# Altium PCB PC110.PcbDoc (part 6 of 24)
Units mm, origin at the board's own origin, x right, y up, seen from the top; angles counter-clockwise.
Board outline 150.05 x 107.35 mm, 10 copper layers (In2.Cu, F.Cu, B.Cu, In1.Cu, In3.Cu, In4.Cu, In5.Cu, In6.Cu, In7.Cu, In8.Cu); 936 components, 1434 nets, 4891 pads, 6088 vias.
Unrouted connection lines stored in the file: 2995.
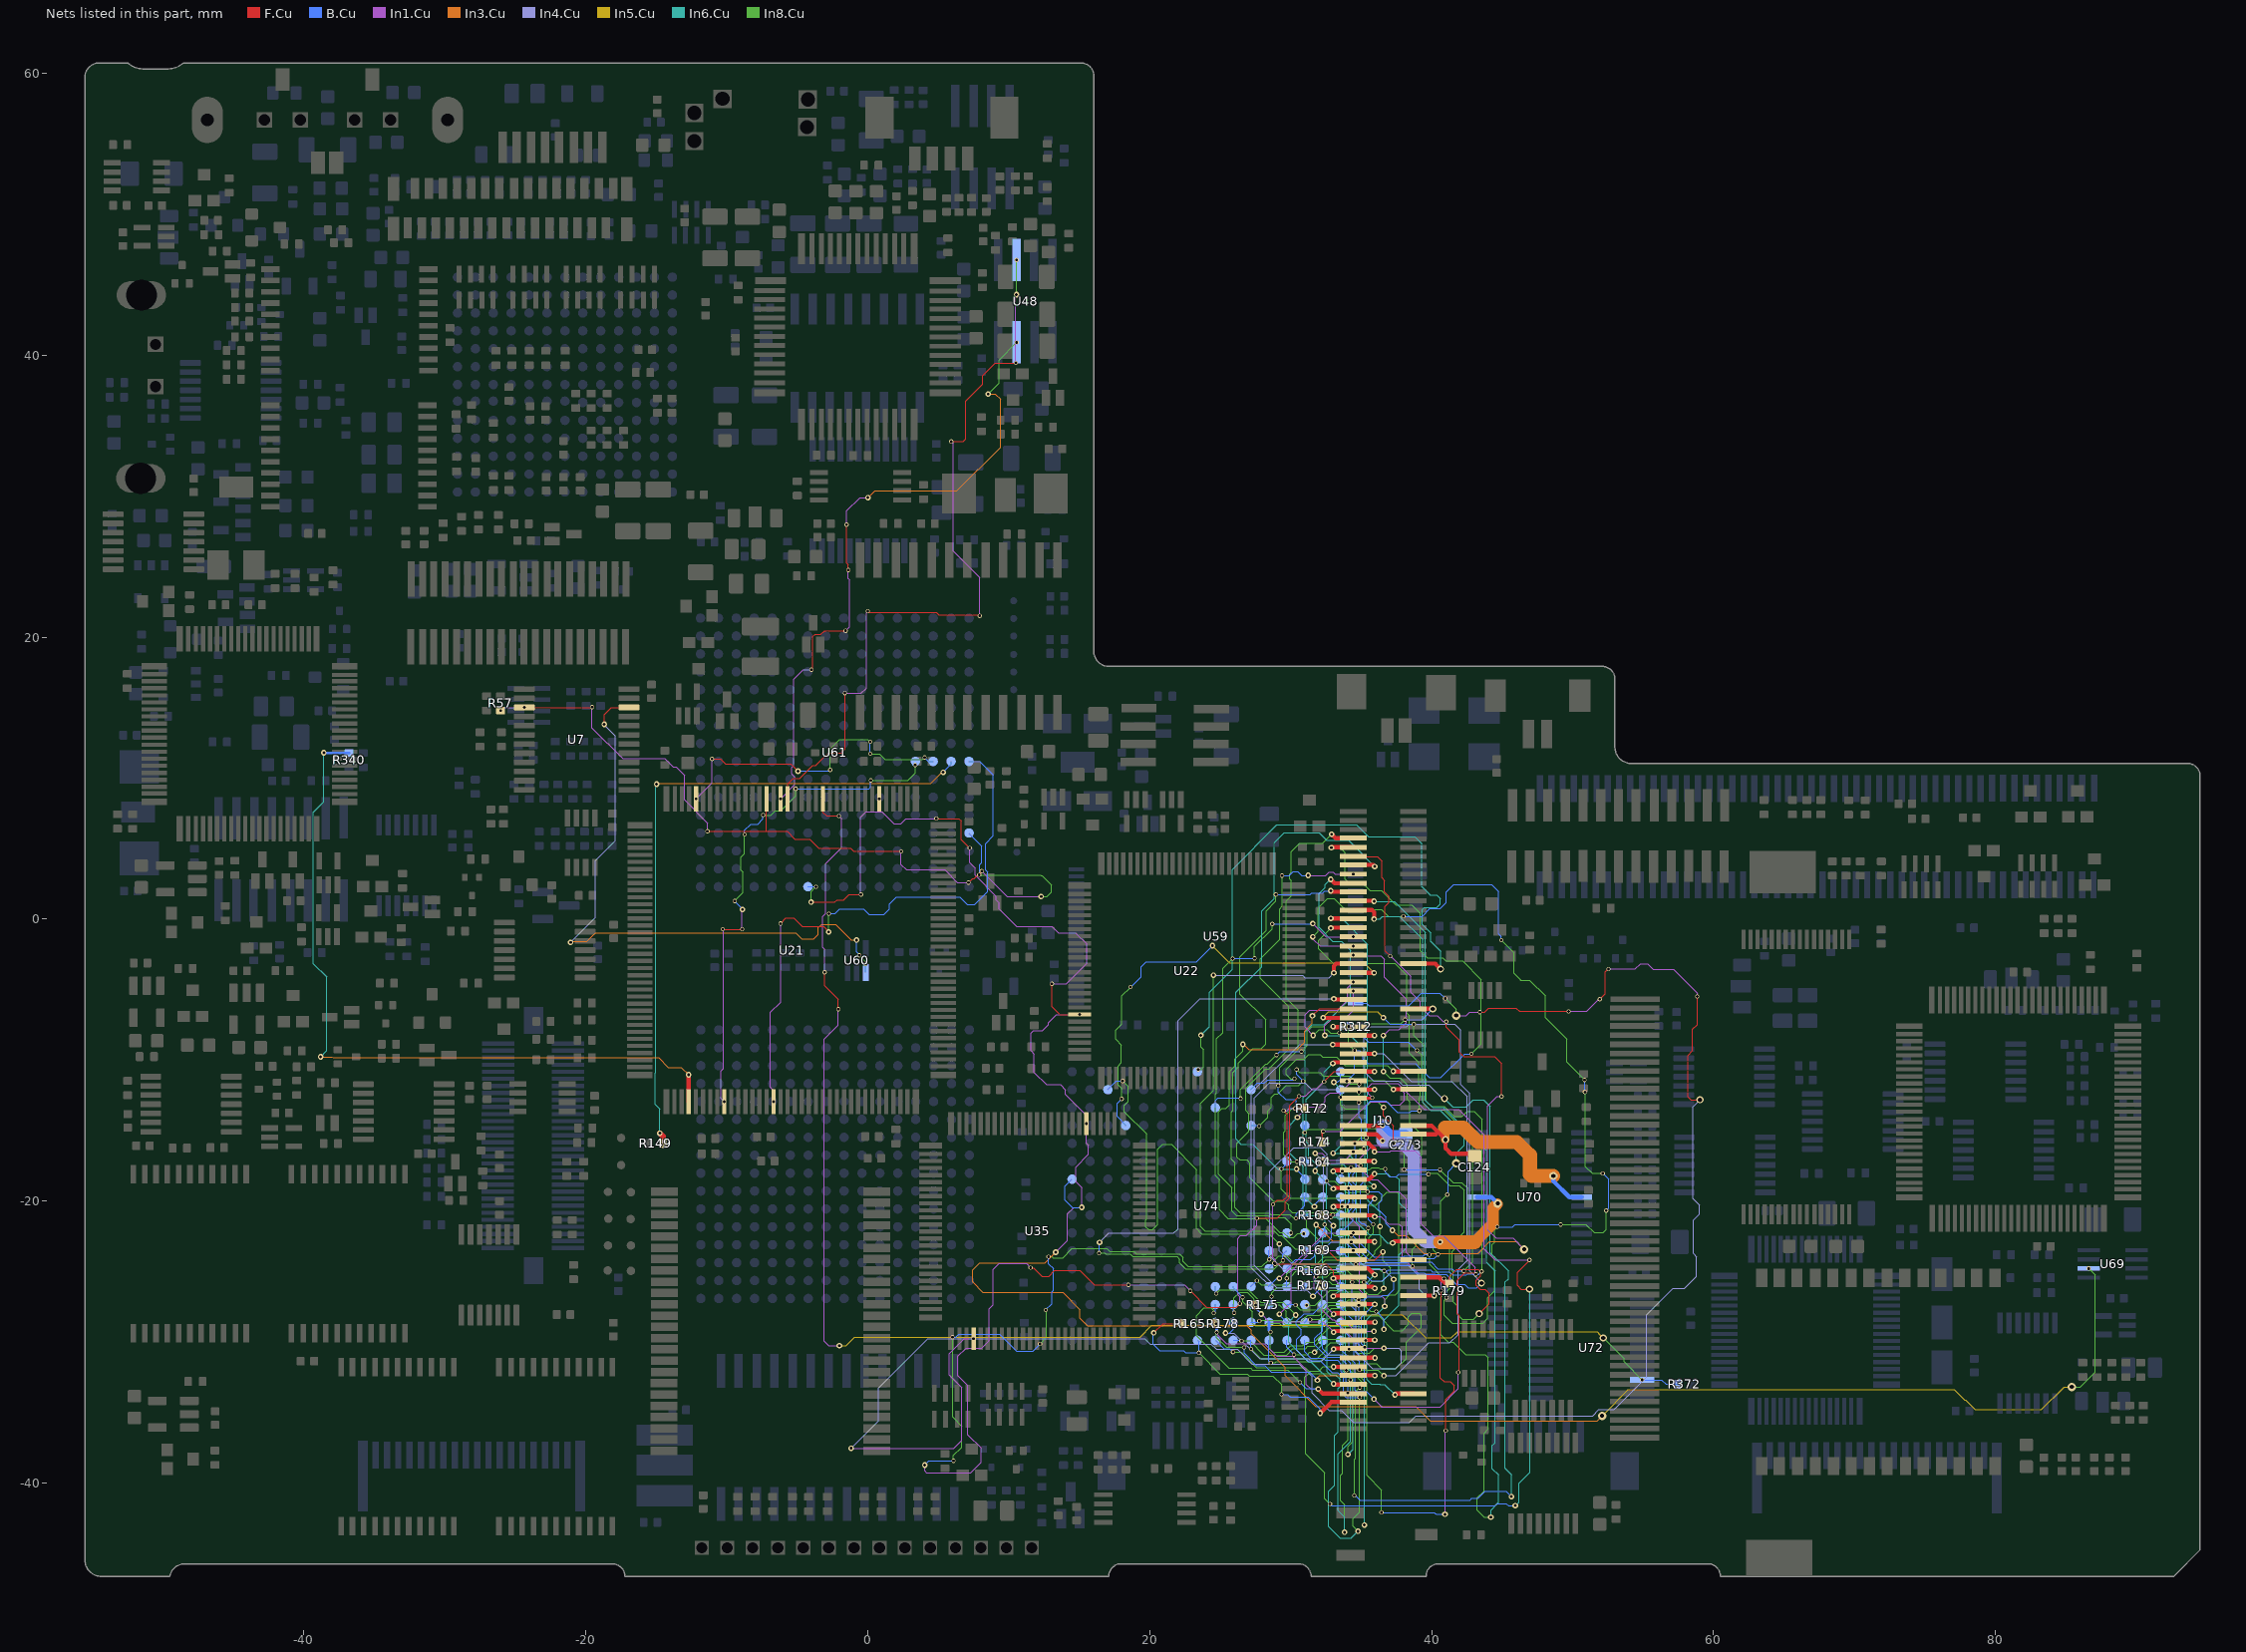
[diagram p13: the nets of this part, all layers, seen from the top]

## Via types
v1: diameter 0.3, hole 0.2, B.Cu to In8.Cu, tented both sides, 1934 vias
v2: diameter 0.4, hole 0.2, F.Cu to B.Cu, tented both sides, 1902 vias
v3: diameter 0.3, hole 0.2, F.Cu to In1.Cu, tented both sides, 1729 vias
v4: diameter 0.6, hole 0.3, F.Cu to B.Cu, tented both sides, 354 vias
v5: diameter 0.5, hole 0.3, F.Cu to B.Cu, tented both sides, 136 vias
v6: diameter 0.4, hole 0.2, B.Cu to In8.Cu, tented both sides, 12 vias
v7: diameter 0.3, hole 0.2, F.Cu to B.Cu, tented both sides, 6 vias
v8: diameter 0.6, hole 0.2, F.Cu to B.Cu, tented both sides, 4 vias
v9: diameter 0.5, hole 0.2, B.Cu to In8.Cu, tented both sides, 3 vias
v10: diameter 0.5, hole 0.2, F.Cu to B.Cu, tented both sides, 2 vias
v11: diameter 0.4, hole 0.3, F.Cu to B.Cu, tented both sides, 2 vias
v12: diameter 0.3, hole 0.2, F.Cu to In4.Cu, tented both sides, 2 vias
v13: diameter 0.6, hole 0.3, B.Cu to In8.Cu, tented both sides, 1 vias
v14: diameter 0.3, hole 0.2, F.Cu to In3.Cu, tented both sides, 1 vias

## Nets (pads, with @x,y where several pads share a name; then routed paths per layer and width w, separated by ;. In a path a pad name is that pad's centre, name@x,y a point inside that pad or via, vN(x,y) a via of type N, cw(c..) or ccw(c..) an arc to the next point about the centre after c; other vN are vias at no path point) (continued)
ACIOWR#: J10.23 U74.P9 | length 21.4
  F.Cu w0.3: J10.23@38.7,-6.35 40.07,-6.35 v5(40.08,-6.36)
  In8.Cu w0.08: v1(26.45,-12.72) 26.45,-12.07 28.24,-10.28 28.35,-10.28 v1(28.99,-9.64) ; v1(30.77,-9.39) 31.18,-8.98 31.18,-7.93 31.49,-7.62 32.33,-7.62 33.01,-6.94 34.97,-6.94 35.45,-7.42 37.81,-7.42 v1(38.11,-7.12)
  B.Cu w0.08: U74.P9@24.65,-13.37 24.65,-12.87 24.83,-12.69 26.42,-12.69 v1(26.45,-12.72) ; v1(28.99,-9.64) 29.24,-9.39 v1(30.77,-9.39) ; v1(38.11,-7.12) 39.32,-7.12 v5(40.08,-6.36)
AEN: U21.114 U22.44 U35.6 U61.G16 U69.6 U74.K1 | length 171.4
  F.Cu w0.08: v2(-4.02,1.21) -2.33,1.21 -2.18,1.36 -1.7,1.36 -1.31,1.75 v3(-0.48,1.75) ; v3(4.86,7.14) 6.47,7.14 6.64,6.97 6.64,5.65 v3(7.24,5.05) ; v3(13.06,-4.58) 13.06,-6.2 13.62,-6.76 v3(15.03,-6.76)
  In1.Cu w0.08: v3(-0.48,1.75) -0.52,1.79 -0.52,7.22 -0.13,7.61 0.83,7.61 ; v3(0.82,8.535) 0.83,8.525 0.83,7.61 ; v3(4.86,7.14) 2.72,7.14 2.34,6.76 1.85,6.76 1,7.61 0.83,7.61 ; v3(7.24,5.05) 7.24,4.02 7.62,3.64 7.62,3.12 9.12,1.62 9.12,1.36 9.32,1.16 9.32,0.73 10.56,-0.51 13.06,-0.51 13.51,-0.96 14.74,-0.96 15.54,-1.76 15.54,-3.14 14.1,-4.58 v3(13.06,-4.58) ; v2(13.33,-23.62) 14.17,-22.78 14.17,-20.88 14.61,-20.44 v2(15.18,-20.44) 15.18,-19.05 14.75,-18.62 14.75,-17.59 15.66,-16.68 15.66,-16.05 15.51,-15.9 v3(15.51,-14.5) 15.51,-13.92 14.03,-12.44 14.03,-12.1 13.66,-11.73 12.67,-11.73 11.81,-10.87 11.81,-9.56 11.58,-9.33 11.58,-8.07 11.76,-7.89 12.39,-7.89 12.81,-7.47 12.81,-7.32 13.37,-6.76 v3(15.03,-6.76)
  In3.Cu w0.08: v2(13.33,-23.62) 12.57,-24.38 7.94,-24.38 7.43,-24.89 7.43,-25.74 8.17,-26.48 13.83,-26.48 15.04,-27.69 15.04,-28.31 15.58,-28.85 26.9,-28.85 27.21,-29.16 27.21,-29.41 29.6,-31.8 29.6,-32.37 31.78,-34.55 38.89,-34.55 39.91,-35.57 51.74,-35.57 v4(52.09,-35.22)
  In5.Cu w0.08: v4(52.09,-35.22) 53.95,-33.36 77.07,-33.36 77.81,-34.1 77.87,-34.1 78.54,-34.77 83.26,-34.77 84.86,-33.17 v4(85.41,-33.17)
  In8.Cu w0.08: v2(-4.02,1.21) -4.02,1.96 v1(-3.68,2.3) ; v4(85.41,-33.17) 86.01,-33.17 87.07,-32.11 87.07,-25.23 86.615,-24.775 v1(86.61,-24.775)
  B.Cu w0.08: U61.G16@-4.25,2.3 v1(-3.68,2.3) ; U74.K1@14.495,-18.44 13.99,-18.945 13.99,-19.92 14.51,-20.44 v2(15.18,-20.44)
AINPACK#: J10.53 R179.2 U74.N14 | length 36
  F.Cu w0.08: R179.2@41.25,-25.85 41.25,-25.36 41.77,-24.84 43.31,-24.84 43.48,-25.01 43.48,-25.31 43.16,-25.63 43.16,-25.98 43.43,-26.25 43.79,-26.25 44.07,-26.53 44.07,-27.28 v5(43.37,-27.98)
  F.Cu w0.3: J10.53@38.7,-25.4 40.54,-25.4 40.99,-25.85 R179.2@41.25,-25.85
  In8.Cu w0.08: v1(31,-15.13) 31.22,-14.91 33.51,-14.91 33.6,-14.82 35.99,-14.82 36.25,-15.08 36.94,-15.08 38.05,-16.19 v1(38.05,-17.75) ; v1(40.59,-17.76) 41.52,-18.69 42.14,-18.69 42.54,-19.09 42.54,-22.5 41.46,-23.58 41.46,-24.96 41.54,-25.04 41.54,-27.15 41.8,-27.41 41.8,-28.01 42.15,-28.36 42.99,-28.36 v5(43.37,-27.98)
  B.Cu w0.08: v1(31,-15.13) U74.N14@31,-14.61 ; v1(38.05,-17.75) 40.58,-17.75 v1(40.59,-17.76)
AOE#: J10.18 U74.T8 | length 44.3
  F.Cu w0.3: J10.18@38.7,-3.15 40.25,-3.15 v5(40.64,-3.54)
  In6.Cu w0.08: v2(23.63,-8.23) 24.25,-7.61 24.25,-5.17 25.86,-3.56 25.86,3.53 29.03,6.7 34.675,6.7 35.515,5.86 38.79,5.86 39.29,5.36 39.29,2.32 39.9,1.71 40.365,1.71 40.6,1.475 40.6,1.08 40.36,0.84 39.49,0.84 39.33,0.68 39.33,-0.36 39.94,-0.97 39.94,-1.58 40.64,-2.28 v5(40.64,-3.54)
  In8.Cu w0.08: v1(23.45,-10.66) 23.64,-10.66 23.83,-10.47 23.83,-9.26 23.63,-9.06 v2(23.63,-8.23)
  B.Cu w0.08: U74.T8@23.38,-10.8 23.45,-10.73 v1(23.45,-10.66)
ARDY: J10.32 R174.2 U74.N11 | length 24.6
  F.Cu w0.1: R174.2@32.23,-15.79 32.23,-15.13 v3(32.31,-15.05)
  F.Cu w0.3: v2(37.29,-12.08) 37.32,-12.05 J10.32@38.7,-12.05
  In1.Cu w0.08: v3(32.31,-15.05) 33.505,-15.05 35.585,-12.97 36.88,-12.97 37.08,-13.17 37.74,-13.17 38.05,-12.86 38.05,-12.32 37.81,-12.08 v2(37.29,-12.08)
  In8.Cu w0.08: v1(27.76,-14.67) 28.38,-14.05 28.38,-13.59 28.61,-13.36 28.61,-12.63 28.86,-12.38 29.1,-12.38 29.67,-11.81 30.57,-11.81 v1(30.89,-11.49) ; v1(30.42,-10.66) 30.65,-10.89 32.08,-10.89 32.3,-11.11 34.18,-11.11 34.45,-11.38 35.29,-11.38 35.34,-11.43 36.64,-11.43 v2(37.29,-12.08)
  B.Cu w0.08: U74.N11@27.19,-14.61 27.7,-14.61 v1(27.76,-14.67) ; v1(30.42,-10.66) 30.42,-11.02 v1(30.89,-11.49)
AREG#: J10.55 U74.R3 | length 48
  F.Cu w0.3: J10.55@38.7,-26.7 v2(40.19,-26.7)
  In4.Cu w0.08: v2(29.2,-23.03) 29.2,-23.54 30.12,-24.46 38.25,-24.46 39.12,-25.33 39.12,-26.27 39.55,-26.7 v2(40.19,-26.7)
  In8.Cu w0.08: v1(18.08,-11.47) 18.48,-11.87 18.48,-12.92 18.21,-13.19 18.21,-13.65 19.79,-15.23 19.79,-21.26 19.72,-21.33 19.72,-21.82 19.91,-22.01 20.2,-22.01 20.56,-21.65 20.56,-16.33 20.91,-15.98 21.54,-15.98 23.31,-17.75 23.31,-21.94 23.69,-22.32 28.49,-22.32 v2(29.2,-23.03)
  B.Cu w0.08: U74.R3@17.03,-12.07 17.63,-11.47 v1(18.08,-11.47)
ARESET: J10.49 U74.T16 | length 17.5
  F.Cu w0.3: v2(37.23,-22.96) 37.34,-22.85 J10.49@38.7,-22.85
  In6.Cu w0.08: v2(33.06,-11.56) 33.63,-12.13 33.63,-15.97 v2(33.01,-16.59) 34.04,-16.59 34.67,-17.22 34.67,-21.49 35.56,-22.38 36.28,-22.38 36.86,-22.96 v2(37.23,-22.96)
  B.Cu w0.08: v2(33.06,-11.56) 33.34,-11.56 33.54,-11.36 U74.T16@33.54,-10.83
AVPP: C124.2 J10.36 J10.37 U70.8 | length 21
  F.Cu w0.3: J10.37@38.7,-15.25 40.29,-15.25 40.44,-15.1 ; J10.36@38.7,-14.65 39.99,-14.65 40.44,-15.1 ; C124.2@43.05,-16.815 42.875,-16.64 41.38,-16.64 40.98,-16.24 v5(40.98,-15.64) 40.44,-15.1
  In3.Cu w0.6: 40.95,-14.78 40.95,-15.61 v5(40.98,-15.64)
  In3.Cu w1: 40.95,-14.78 42.24,-14.78 42.96,-15.5 43.27,-15.81 45.51,-15.81 46.05,-15.81 46.72,-16.48 46.97,-16.73 46.97,-18.1 47.08,-18.21 47.7,-18.21 v4(48.63,-18.21)
  B.Cu w0.3: v4(48.63,-18.21) 48.63,-18.57 49.77,-19.71 U70.8@50.645,-19.71
AWAIT: J10.51 R164.2 U74.R16 | length 22.5
  F.Cu w0.08: v2(36.59,-13.35) 36.59,-13.94 37.29,-14.64 v3(37.29,-15.91)
  In1.Cu w0.08: v3(32.23,-17.21) 32.33,-17.31 34.58,-17.31 ; v3(37.29,-15.91) 37.03,-16.17 36.37,-16.17 36.25,-16.05 35.84,-16.05 34.58,-17.31 ; v3(38.7,-24.15) 38.2,-23.65 38.2,-19.85 37.68,-19.33 37,-19.33 36.14,-18.47 35.74,-18.47 34.58,-17.31
  In8.Cu w0.08: v1(33.54,-12.63) 33.54,-13.16 33.84,-13.46 35.18,-13.46 35.72,-12.92 36.16,-12.92 v2(36.59,-13.35)
  B.Cu w0.08: v1(33.54,-12.63) U74.R16@33.54,-12.07
AWE#: J10.30 U74.R11 | length 14.4
  F.Cu w0.3: v2(37.28,-10.79) 37.29,-10.8 J10.30@38.7,-10.8
  In8.Cu w0.08: v1(30.27,-11.32) 30.02,-11.32 29.7,-11 29.7,-10.65 30.44,-9.91 30.96,-9.91 31.28,-9.59 32.09,-9.59 32.28,-9.78 33.26,-9.78 33.85,-10.37 36.86,-10.37 v2(37.28,-10.79)
  B.Cu w0.08: U74.R11@27.19,-12.07 27.63,-11.63 28.14,-11.63 28.36,-11.41 30.18,-11.41 v1(30.27,-11.32)
AWP: J10.66 R168.2 U74.L13 | length 39.9
  F.Cu w0.2: R168.2@32.2,-21 32.96,-21 v3(32.99,-20.97)
  F.Cu w0.3: v2(37.4,-33.73) 37.48,-33.65 J10.66@38.7,-33.65
  In1.Cu w0.08: v3(32.99,-20.97) 34.02,-20.97 34.9,-21.85 34.9,-26.28 35.33,-26.71 36.43,-26.71 36.67,-26.95 v2(36.67,-27.45)
  In6.Cu w0.08: v2(36.67,-27.45) 36.11,-28.01 35.78,-28.01 35.41,-28.38 35.41,-32.66 35.73,-32.98 36.33,-32.98 36.34,-32.99 36.66,-32.99 v2(37.4,-33.73)
  In8.Cu w0.08: v1(29.34,-17.72) 29.34,-19.15 29.97,-19.78 34.32,-19.78 34.81,-20.27 36.05,-20.27 36.43,-19.89 36.43,-19.74 36.82,-19.35 37.53,-19.35 37.69,-19.51 37.69,-25.12 37.76,-25.19 37.76,-26.3 37.42,-26.64 37.01,-26.64 36.67,-26.98 v2(36.67,-27.45)
  B.Cu w0.08: v1(29.34,-17.72) 29.73,-17.33 U74.L13@29.73,-17.15
B5VDET: J10.89 U74.N4 | length 32.2
  F.Cu w0.3: J10.89@34.45,-3.8 v2(35.92,-3.8)
  In5.Cu w0.08: v2(24.45,-1.88) 25.66,-3.09 35.21,-3.09 v2(35.92,-3.8)
  In8.Cu w0.08: v1(18.01,-12.75) 18.01,-11.99 17.76,-11.74 17.76,-10.4 18,-10.16 18,-8.92 17.6,-8.52 17.6,-7.86 18.03,-7.43 18.03,-5.42 v1(18.64,-4.81)
  B.Cu w0.08: v1(18.01,-12.75) 17.69,-13.07 17.69,-14 18.3,-14.61 U74.N4@18.3,-14.64 ; v1(18.64,-4.81) 19.38,-4.07 19.38,-3.37 19.74,-3.01 23.32,-3.01 v2(24.45,-1.88)
BBVD1: J10.129 R175.1 U74.C11 | length 8.9
  F.Cu w0.3: v2(33.04,-29.29) 33.13,-29.2 J10.129@34.45,-29.2
  In1.Cu w0.08: v3(27.5,-27.36) 27.5,-27.59 v2(27.91,-28) 28.45,-28.54 32.31,-28.54 33.04,-29.27 v2(33.04,-29.29)
  B.Cu w0.08: U74.C11@27.19,-27.31 27.22,-27.31 v2(27.91,-28)
BBVD2: J10.127 R170.2 U74.B11 | length 10.2
  F.Cu w0.3: v2(33.04,-28.01) 33.1,-27.95 J10.127@34.45,-27.95
  In1.Cu w0.08: v3(32.14,-25.97) 32.58,-26.41 32.58,-27.55 v2(33.04,-28.01)
  In8.Cu w0.08: v1(27.77,-28.5) 27.83,-28.44 29.32,-28.44 29.61,-28.73 32.1,-28.73 32.48,-28.35 32.7,-28.35 v2(33.04,-28.01)
  B.Cu w0.08: U74.B11@27.19,-28.58 27.69,-28.58 v1(27.77,-28.5)
BCA0: J10.128 U74.D10 | length 13.8
  F.Cu w0.3: J10.128@34.45,-28.6 35.96,-28.6 v2(35.98,-28.58)
  In8.Cu w0.08: v1(26.6,-26.82) 26.6,-27.14 27.29,-27.83 27.29,-28.64 27.5,-28.85 28.15,-28.85 28.34,-28.66 29.2,-28.66 29.46,-28.92 32.27,-28.92 32.61,-28.58 v2(35.98,-28.58)
  B.Cu w0.08: U74.D10@25.92,-26.04 25.92,-26.14 v1(26.6,-26.82)
BCA1: J10.126 U74.A11 | length 14.8
  F.Cu w0.08: v2@35.95,-27.3 v2(35.96,-27.31)
  F.Cu w0.3: J10.126@34.45,-27.3 v2@35.95,-27.3
  In8.Cu w0.08: v1(27.19,-30.47) 27.81,-31.09 ; 27.85,-31.13 27.81,-31.09 ; v1(35.26,-30.35) 34.98,-30.35 34.67,-30.04 32.83,-30.04 32.5,-30.37 32.5,-30.56 31.88,-31.18 27.9,-31.18 27.81,-31.09
  B.Cu w0.08: v1(27.19,-30.47) U74.A11@27.19,-29.85 ; v1(35.26,-30.35) 35.02,-30.11 35.02,-28.25 v2(35.96,-27.31)
BCA2: J10.124 U74.D11 | length 11.9
  F.Cu w0.3: J10.124@34.45,-26.05 35.84,-26.05 v2(35.97,-26.18)
  In8.Cu w0.08: v1(27.6,-25.64) 27.9,-25.94 29.83,-25.94 30.04,-25.73 30.04,-25.33 30.41,-24.96 32.59,-24.96 32.68,-24.87 33.97,-24.87 34.84,-25.74 v1(35.2,-25.74)
  B.Cu w0.08: U74.D11@27.19,-26.07 27.19,-26.04 27.59,-25.64 v1(27.6,-25.64) ; v1(35.2,-25.74) 35.29,-25.74 35.73,-26.18 v2(35.97,-26.18)
BCA3: J10.122 U74.A12 | length 39.6
  F.Cu w0.3: J10.122@34.45,-24.75 35.48,-24.75 v2(35.96,-25.23)
  In6.Cu w0.08: v2(35.23,-42.97) 35.23,-25.96 v2(35.96,-25.23)
  In8.Cu w0.08: v1(28.59,-31.46) 28.89,-31.46 28.98,-31.37 32.08,-31.37 32.52,-30.93 34,-30.93 34.41,-31.34 34.41,-32.2 35.23,-33.02 v2(35.23,-42.97)
  B.Cu w0.08: U74.A12@28.46,-29.85 28.46,-31.33 v1(28.59,-31.46)
BCA4: J10.120 U74.B13 | length 9.2
  In1.Cu w0.08: v2(29.2,-28.01) 30.05,-27.16 30.05,-24.97 31.52,-23.5 v3(34.45,-23.5)
  B.Cu w0.08: v2(29.2,-28.01) 29.2,-28.05 U74.B13@29.73,-28.58
BCA5: J10.118 U74.D12 | length 7.6
  In1.Cu w0.08: v2(29.2,-25.48) 32.43,-22.25 v3(34.45,-22.25)
  B.Cu w0.08: U74.D12@28.46,-26.07 28.46,-26.04 29.02,-25.48 v2(29.2,-25.48)
BCA6: J10.116 U74.B14 | length 60.8
  F.Cu w0.08: v3(40.67,-26.34) 40.67,-28.42 40.62,-28.47 40.62,-32.53 40.9,-32.81 41.33,-32.81 41.59,-33.07 41.59,-33.48 41,-34.07 v3(41,-36.28)
  F.Cu w0.3: J10.116@34.45,-21 35.86,-21 v2(35.96,-21.1)
  In1.Cu w0.08: v2(35.96,-21.1) 36.42,-21.1 36.93,-21.61 37.69,-21.61 37.92,-21.84 37.92,-23.98 39.08,-25.14 40.22,-25.14 40.67,-25.59 v3(40.67,-26.34) ; v2(40.95,-42.21) 40.95,-36.33 v3(41,-36.28)
  In8.Cu w0.08: v1(31.38,-28.39) 32.09,-28.39 32.89,-27.59 33.76,-27.59 34.31,-28.14 36.26,-28.14 37.29,-29.17 37.92,-29.17 38.35,-28.74 38.35,-28.21 38.6,-27.96 39.12,-27.96 39.28,-28.12 39.28,-28.94 38.21,-30.01 38.21,-31.15 37.48,-31.88 36.45,-31.88 36.1,-31.53 34.74,-31.53 34.58,-31.69 34.58,-32.11 35.4,-32.93 35.4,-39.45 36.44,-40.49 v1(36.44,-42.08)
  B.Cu w0.08: U74.B14@31,-28.61 U74.B14@31.22,-28.39 ; U74.B14@31,-28.58 31.19,-28.39 v1(31.38,-28.39) ; v1(36.44,-42.08) 40.17,-42.08 40.27,-42.18 40.3,-42.18 40.33,-42.21 v2(40.95,-42.21)
BCA7: J10.114 U74.D13 | length 13.2
  F.Cu w0.3: J10.114@34.45,-19.7 35.82,-19.7 v2(35.95,-19.83)
  In8.Cu w0.08: v1(29.72,-25.48) 29.72,-25.16 30.17,-24.71 31.93,-24.71 32.47,-24.17 35.11,-24.17 35.54,-23.74 35.54,-22.57 35.86,-22.25 v1(35.86,-21.64)
  B.Cu w0.08: v1(29.72,-25.48) 29.73,-25.49 U74.D13@29.73,-26.07 ; v1(35.86,-21.64) 35.51,-21.29 35.51,-20.27 v2(35.95,-19.83)
BCA8: J10.94 U74.E15 | length 42.4
  F.Cu w0.3: v2(32.3,-6.98) 32.32,-7 J10.94@34.45,-7
  In5.Cu w0.08: v2(32.3,-6.98) 32.3,-6.95 32.69,-6.56 36.15,-6.56 v2(36.57,-6.98)
  In8.Cu w0.08: v1(32.38,-24.66) 34.31,-24.66 34.53,-24.88 35.26,-24.88 35.38,-24.76 36.22,-24.76 36.4,-24.94 v1(36.64,-24.94) ; v1(38.74,-7.45) 38.74,-8.24 39.51,-9.01 39.51,-11.31 39.61,-11.41 39.61,-12.92 39.96,-13.27 40.89,-13.27 41.59,-13.97 42.17,-13.97 42.52,-13.62 43.01,-13.62 43.59,-14.2 43.59,-24.93 v1(43.54,-24.98)
  B.Cu w0.08: U74.E15@32.27,-24.77 v1(32.38,-24.66) ; v2(36.57,-6.98) 37.04,-7.45 v1(38.74,-7.45) ; v1(36.64,-24.94) 36.87,-24.94 36.92,-24.89 39.93,-24.89 40.05,-25.01 41.26,-25.01 41.49,-25.24 42.46,-25.24 42.54,-25.16 42.93,-25.16 42.97,-25.2 43.32,-25.2 v1(43.54,-24.98)
BCA9: J10.92 U74.F13 | length 49.3
  F.Cu w0.3: v2(33.06,-5.65) 33.11,-5.7 J10.92@34.45,-5.7
  In4.Cu w0.08: v2(16.44,-22.92) 17.09,-22.27 21.71,-22.27 22.02,-21.96 22.02,-7.19 23.56,-5.65 v2(33.06,-5.65)
  In8.Cu w0.08: v1(16.41,-23.68) 16.83,-23.68 16.9,-23.75 18.63,-23.75 18.81,-23.93 21.94,-23.93 22.13,-24.12 22.13,-24.39 22.56,-24.82 28.835,-24.82 v1(29.45,-24.205)
  B.Cu w0.08: v1(16.41,-23.68) 16.44,-23.65 v2(16.44,-22.92) ; v1(29.45,-24.205) 29.45,-23.78 29.7,-23.53 U74.F13@29.73,-23.53
BCA10: J10.86 U74.G15 | length 81.2
  In1.Cu w0.08: v2(31.57,-1.25) 31.57,-1.38 32.09,-1.9 v3(34.45,-1.9)
  In8.Cu w0.08: v2(31.57,-1.25) 31.96,-0.86 31.96,0.81 32.62,1.47 33.09,1.47 33.86,0.7 36.43,0.7 36.92,0.21 v1(37.99,0.21) ; v1(32.41,-21.66) 32.41,-21.78 33.07,-22.44 v1(34.3,-22.44) ; v1(39.83,-23.79) 39.87,-23.83 39.87,-24.5 v1(40.87,-25.5) ; v1(41.06,-26.84) 40.88,-27.02 40.88,-28.08 41.45,-28.65 43.64,-28.65 43.98,-28.31 43.98,-26.84 44.45,-26.37 44.45,-23.97 44.3,-23.82 44.3,-23.07 44.45,-22.92 44.45,-22.03 v1(44.66,-21.82) ; v1(44.94,-1.48) 45.85,-2.39 45.85,-3.84 46.32,-4.31 46.32,-4.32 46.95,-4.32 48.07,-5.44 48.07,-6.99 49.59,-8.51 49.59,-10.14 v1(50.85,-11.4) ; v1(49.15,-21.66) 50.95,-21.66 51.52,-22.23 52.18,-22.23 52.39,-22.02 v1(52.39,-20.67) ; v1(50.87,-12.26) 50.89,-12.28 50.89,-17.54 51.38,-18.03 v1(52.14,-18.03)
  B.Cu w0.08: U74.G15@32.27,-22.23 32.41,-22.09 v1(32.41,-21.66) ; v1(34.3,-22.44) 34.4,-22.44 35.92,-23.96 37.98,-23.96 38.05,-23.89 39.41,-23.89 39.51,-23.79 v1(39.83,-23.79) ; v1(37.99,0.21) 39.32,0.21 39.86,0.75 40.61,0.75 41.04,1.18 41.04,1.92 41.58,2.46 44.24,2.46 44.75,1.95 44.75,-1.04 44.94,-1.23 v1(44.94,-1.48) ; v1(40.87,-25.5) 40.92,-25.5 41.06,-25.64 v1(41.06,-26.84) ; v1(44.66,-21.82) 45.75,-21.82 45.91,-21.66 v1(49.15,-21.66) ; v1(50.85,-11.4) 50.87,-11.42 v1(50.87,-12.26) ; v1(52.14,-18.03) 52.56,-18.45 52.56,-20.5 v1(52.39,-20.67)
BCA11: J10.90 U74.F15 | length 44
  In1.Cu w0.08: v2(31.59,-8.24) 31.02,-7.67 31.02,-6.77 31.35,-6.44 33.33,-6.44 34.04,-5.73 34.04,-4.86 v3(34.45,-4.45)
  In8.Cu w0.08: v2(31.59,-8.24) 32.01,-7.82 32.59,-7.82 32.84,-8.07 v1(33.45,-8.07) ; v1(38.96,-9.3) 39.3,-9.64 39.3,-11.53 39.4,-11.63 39.4,-13.06 39.86,-13.52 40.85,-13.52 42.9,-15.57 42.9,-24.32 v1(42.28,-24.94)
  B.Cu w0.08: U74.F15@32.27,-23.5 32.86,-22.91 33.87,-22.91 35.31,-24.35 38.2,-24.35 38.24,-24.31 39.96,-24.31 40.44,-24.79 41.45,-24.79 41.6,-24.94 v1(42.28,-24.94) ; v1(33.45,-8.07) 34.89,-8.07 35.52,-8.7 38.36,-8.7 v1(38.96,-9.3)
BCA12: J10.112 U74.C14 | length 23.2
  F.Cu w0.3: J10.112@34.45,-18.45 35.55,-18.45 v2(35.94,-18.06)
  In6.Cu w0.08: v2(35.94,-18.06) 36.88,-18.06 37.07,-18.25 37.48,-18.25 37.72,-18.49 37.72,-20.12 38.23,-20.63 38.23,-23.28 37.69,-23.82 37.69,-27.39 36.62,-28.46 v2(36.62,-29.09)
  In8.Cu w0.08: v1(31.13,-27.39) 31.73,-27.39 32.8,-26.32 33.34,-26.32 33.46,-26.44 34.86,-26.44 35.32,-26.9 35.32,-27.49 35.65,-27.82 v1(36.07,-27.82)
  B.Cu w0.08: U74.C14@31,-27.34 31.05,-27.39 v1(31.13,-27.39) 31.08,-27.39 U74.C14@31,-27.31 ; v1(36.07,-27.82) 36.62,-28.37 v2(36.62,-29.09)
BCA13: J10.96 U74.E14 | length 75.1
  F.Cu w0.3: J10.96@34.45,-8.25 v2(35.94,-8.25)
  In4.Cu w0.08: v2(35.94,-8.25) 35.3,-8.25 35.2,-8.35 35.2,-10.79 35.88,-11.47 37.63,-11.47 37.93,-11.77 39.8,-11.77 40.75,-12.72 v5(40.91,-12.72)
  In6.Cu w0.08: v5(40.91,-12.72) 41.49,-13.3 42.45,-13.3 42.93,-12.82 43.7,-12.82 44.16,-13.28 44.16,-23.68 45.44,-24.96 45.44,-25.5 45.2,-25.74 45.2,-38.96 45.66,-39.42 v2(45.66,-40.95)
  In8.Cu w0.08: v1(31.81,-25.36) 32.55,-25.36 32.87,-25.04 33.66,-25.04 v1(34.36,-25.74) ; v1(34.52,-40.88) 34.52,-38.32 34.61,-38.23 34.61,-33.51 v1(34.9,-33.22)
  B.Cu w0.08: U74.E14@31,-24.77 31.21,-24.77 31.8,-25.36 v1(31.81,-25.36) ; v1(34.36,-25.74) 34.36,-27.5 34.65,-27.79 34.65,-30.69 35.22,-31.26 35.22,-32.9 v1(34.9,-33.22) ; v1(34.52,-40.88) 34.59,-40.88 34.92,-41.21 42.72,-41.21 42.85,-41.08 43.29,-41.08 43.79,-40.58 45.29,-40.58 v2(45.66,-40.95)
BCA14: J10.98 U74.C16 | length 40
  F.Cu w0.3: J10.98@34.45,-9.55 35.92,-9.55 v2(35.94,-9.53)
  In4.Cu w0.08: v2(35.94,-9.53) 36.59,-9.53 38.56,-11.5 41.43,-11.5 42.51,-12.58 42.51,-24.19 41.87,-24.83 41.87,-29.47 41.29,-30.05 39.78,-30.05 37.45,-32.38 v2(36.61,-32.38)
  In8.Cu w0.08: v1(34.88,-31.97) 36.2,-31.97 v2(36.61,-32.38)
  B.Cu w0.08: U74.C16@33.54,-27.34 33.54,-27.57 34.48,-28.51 34.48,-30.97 34.88,-31.37 v1(34.88,-31.97)
BCA15: J10.110 U74.E12 | length 17.4
  F.Cu w0.3: J10.110@34.45,-17.15 35.9,-17.15 v2(35.93,-17.18)
  In8.Cu w0.08: v1(28.84,-24.39) 28.84,-24.2 29.15,-23.89 29.72,-23.89 30.35,-24.52 31.79,-24.52 32.37,-23.94 34.98,-23.94 35.32,-23.6 35.32,-22.47 35.51,-22.28 v1(35.51,-21.9) ; v1(34.96,-17.47) 35.25,-17.18 v2(35.93,-17.18)
  B.Cu w0.08: U74.E12@28.46,-24.77 v1(28.84,-24.39) ; v1(34.96,-17.47) 34.97,-17.48 34.97,-17.88 35.12,-18.03 35.12,-18.67 34.94,-18.85 34.94,-20.98 34.83,-21.09 34.83,-21.42 35.01,-21.6 35.21,-21.6 v1(35.51,-21.9)
BCA16: J10.108 U74.A16 | length 37.4
  F.Cu w0.08: v3(41.88,-32.14) 41.94,-32.08 41.94,-28.13 41.81,-28 41.81,-25.61 42.33,-25.09 43.03,-25.09 v3(43.13,-25.19)
  F.Cu w0.3: J10.108@34.45,-15.9 35.53,-15.9 35.94,-16.31 v2(35.94,-16.49)
  In1.Cu w0.08: v2(35.91,-34.04) 36.44,-34.57 36.44,-34.58 40.6,-34.58 41.88,-33.3 v3(41.88,-32.14) ; v2(35.94,-16.49) 37.04,-16.49 37.12,-16.41 38.79,-16.41 39.28,-16.9 39.28,-21.63 40.11,-22.46 40.86,-22.46 43.09,-24.69 43.09,-25.15 v3(43.13,-25.19)
  B.Cu w0.08: U74.A16@33.54,-29.85 33.54,-30.48 34.56,-31.5 34.56,-33.39 34.67,-33.5 35.37,-33.5 v2(35.91,-34.04)
BCA17: J10.95 U74.D16 | length 40.9
  F.Cu w0.3: v2(33.01,-7.61) 33.05,-7.65 J10.95@34.45,-7.65
  In4.Cu w0.08: v2(33.01,-7.61) 38.25,-7.61 38.41,-7.45 41.65,-7.45 42.06,-7.86 42.06,-11.73 42.69,-12.36 42.69,-24.96 v5(43.54,-25.81)
  B.Cu w0.08: U74.D16@33.54,-26.07 33.54,-25.53 33.69,-25.38 35.45,-25.38 35.73,-25.66 36.52,-25.66 37.11,-25.07 39.47,-25.07 39.58,-25.18 41.02,-25.18 41.74,-25.9 42.33,-25.9 42.59,-26.16 43.19,-26.16 v5(43.54,-25.81)
BCA18: J10.97 U74.D15 | length 27.3
  F.Cu w0.3: v2(32.98,-8.89) 32.99,-8.9 J10.97@34.45,-8.9
  In4.Cu w0.08: v2(31.58,-26.75) 31.17,-26.34 28.84,-26.34 27.22,-24.72 27.22,-12.3 30.63,-8.89 v2(32.98,-8.89)
  B.Cu w0.08: v2(31.58,-26.75) 31.58,-26.73 U74.D15@32.27,-26.04
BCA19: J10.99 U74.D14 | length 28.9
  F.Cu w0.3: v2(32.99,-10.23) 33.07,-10.15 J10.99@34.45,-10.15
  In6.Cu w0.08: v2(32.99,-10.23) 32.37,-10.85 32.37,-11.52 31.1,-12.79 31.1,-15.79 31.27,-15.96 31.27,-16.86 31.8,-17.39 33.7,-17.39 34.12,-17.81 34.12,-24.21 34.67,-24.76 36.31,-24.76 36.6,-25.05 v2(36.6,-26.18)
  In8.Cu w0.08: v1(31.3,-26.11) 33.65,-26.11 33.76,-26.22 35.08,-26.22 35.47,-26.61 36.18,-26.61 36.6,-26.19 v2(36.6,-26.18)
  B.Cu w0.08: U74.D14@31,-26.07 31.04,-26.11 v1(31.3,-26.11) 31.07,-26.11 U74.D14@31,-26.04
BCA20: J10.101 U74.C15 | length 61
  In1.Cu w0.08: v2(30.48,-14.05) 31.22,-13.31 32.08,-13.31 32.46,-12.93 32.46,-12.6 32.615,-12.445 32.665,-12.445 32.79,-12.32 33.51,-12.32 v3(34.36,-11.47)
  In6.Cu w0.08: v2(30.48,-14.05) 29.89,-14.64 29.89,-16.58 30.88,-17.57 30.88,-20.68 31.23,-21.03 32.31,-21.03 32.46,-21.18 32.46,-22.41 32.26,-22.61 32.26,-25.52 32.6,-25.86 32.6,-32.09 32.83,-32.32 33.2,-32.32 33.51,-32.63 33.51,-33.16 33.38,-33.29 33.38,-36.35 33.1,-36.63 33.1,-40.15 32.68,-40.57 32.68,-43.09 33.49,-43.9 34.29,-43.9 v2(34.78,-43.41)
  In8.Cu w0.08: v2(34.78,-43.41) 34.43,-43.06 34.43,-42.5 34.89,-42.04 v1(34.89,-33.91)
  B.Cu w0.08: U74.C15@32.27,-27.31 31.6,-27.98 30.95,-27.98 30.4,-28.53 30.4,-28.75 30.75,-29.1 30.75,-29.467 30.43,-29.787 30.43,-30.57 31.16,-31.3 32.08,-31.3 32.94,-32.16 33.34,-32.16 33.74,-32.56 33.74,-33.71 33.94,-33.91 v1(34.89,-33.91)
BCA21: J10.103 U74.B15 | length 73.9
  F.Cu w0.08: v5(46.94,-26.24) 46.35,-26.24 46.09,-25.98 46.09,-25.04 46.94,-24.19 v3(46.94,-24.17)
  F.Cu w0.2: J10.103@34.45,-12.7 35.74,-12.7 v3(35.79,-12.65)
  In1.Cu w0.08: v3(35.79,-12.65) 35.52,-12.38 35.52,-11.9 35.78,-11.64 37.62,-11.64 39.47,-13.49 41.92,-13.49 43.73,-15.3 43.73,-23.39 44.51,-24.17 v3(46.94,-24.17)
  In6.Cu w0.08: v2(45.93,-41.59) 46.18,-41.34 46.18,-40.02 46.97,-39.23 46.97,-26.27 v5(46.94,-26.24)
  In8.Cu w0.08: v1(32.79,-41.48) 32.42,-41.11 32.42,-39.26 31.07,-37.91 31.07,-34 31,-33.93 31,-32.49 31.26,-32.23 33.7,-32.23 v1(33.94,-31.99)
  B.Cu w0.08: U74.B15@32.27,-28.58 32.27,-29.17 31.71,-29.73 31.71,-30.17 32.6,-31.06 33.49,-31.06 33.94,-31.51 v1(33.94,-31.99) ; v1(32.79,-41.48) 32.92,-41.61 44.49,-41.61 44.66,-41.44 45.29,-41.44 45.44,-41.59 v2(45.93,-41.59)
BCA22: J10.109 U74.E13 | length 14.2
  In1.Cu w0.08: v2(31.73,-16.6) 32.23,-16.6 32.72,-17.09 33.86,-17.09 v3(34.45,-16.5)
  In4.Cu w0.08: v2(31.73,-16.6) 32.32,-17.19 32.32,-21.03 v2(33.03,-21.74)
  B.Cu w0.08: U74.E13@29.73,-24.77 30.36,-24.14 31.43,-24.14 31.69,-23.88 31.69,-23.17 32.05,-22.81 32.69,-22.81 32.91,-22.59 32.91,-21.86 v2(33.03,-21.74)
BCA23: J10.111 U74.A15 | length 31.9
  F.Cu w0.3: v2(33.02,-17.87) 33.09,-17.8 J10.111@34.45,-17.8
  In6.Cu w0.08: v2(33.02,-17.87) 33.91,-18.76 33.91,-31.73 34.41,-32.23 34.41,-37.61 v2(34.06,-37.96)
  In8.Cu w0.08: v2(34.06,-37.96) 34.06,-37.38 34.37,-37.07 34.37,-33.14 34.25,-33.02 v1(34.25,-32.68)
  B.Cu w0.08: U74.A15@32.27,-29.85 32.27,-30.46 32.68,-30.87 33.62,-30.87 34.25,-31.5 v1(34.25,-32.68)
BCA24: J10.113 U74.C13 | length 33.5
  F.Cu w0.3: v2(33.03,-19.12) 33.1,-19.05 J10.113@34.45,-19.05
  In4.Cu w0.08: v2(33.03,-19.12) 32.59,-18.68 32.59,-16.68 32.1,-16.19 30.96,-16.19 30.945,-16.205 30.215,-16.205 28.53,-17.89 28.53,-23.88 29.48,-24.83 36.59,-24.83 v2(37.31,-25.55)
  In8.Cu w0.08: v1(30.35,-27.37) 30.68,-27.7 32.11,-27.7 32.62,-27.19 33.9,-27.19 34.09,-27 v1(34.82,-27)
  B.Cu w0.08: U74.C13@29.73,-27.31 30.29,-27.31 v1(30.35,-27.37) ; v1(34.82,-27) 35.24,-27 35.46,-26.78 36.42,-26.78 36.54,-26.66 36.91,-26.66 37.31,-26.26 v2(37.31,-25.55)
BCA25: J10.115 U74.A14 | length 41.8
  F.Cu w0.3: v2(33.03,-20.4) 33.08,-20.35 J10.115@34.45,-20.35
  In6.Cu w0.08: v2(33.03,-20.4) 33.71,-21.08 33.71,-32.06 34.24,-32.59 34.24,-37.05 33.36,-37.93 33.36,-41.95 33.83,-42.42 33.83,-43.47 v2(33.82,-43.48)
  In8.Cu w0.08: v2(33.82,-43.48) 33.82,-41.53 33.54,-41.25 33.54,-39.44 33.67,-39.31 33.67,-37.33 34.07,-36.93 34.07,-33.6 v1(34.06,-33.59)
  B.Cu w0.08: U74.A14@31,-29.85 31,-30.69 31.43,-31.12 32.3,-31.12 32.46,-31.28 33.33,-31.28 33.59,-31.54 33.59,-32.1 33.92,-32.43 33.92,-32.8 34.06,-32.94 v1(34.06,-33.59)
BCD0: J10.130 U74.A10 | length 12.5
  F.Cu w0.3: J10.130@34.45,-29.85 v2(35.96,-29.85)
  In8.Cu w0.08: v1(26.51,-29.91) 27.11,-29.91 28.11,-30.91 29.71,-30.91 30.15,-30.47 31.05,-30.47 31.22,-30.3 31.69,-30.3 32.2,-29.79 34.61,-29.79 34.69,-29.87 v1(35.33,-29.87)
  B.Cu w0.08: U74.A10@25.925,-29.87 26.47,-29.87 v1(26.51,-29.91) ; v1(35.33,-29.87) 35.94,-29.87 v2(35.96,-29.85)
BCD1: J10.132 U74.C10 | length 18.3
  F.Cu w0.3: J10.132@34.45,-31.1 35.96,-31.1 v2(35.98,-31.12)
  In8.Cu w0.08: v1(25.99,-27.91) 25.99,-26.87 26.38,-26.48 26.91,-26.48 27.77,-27.34 29.19,-27.34 29.67,-27.82 29.67,-28.25 29.94,-28.52 30.78,-28.52 31.21,-28.09 32.07,-28.09 32.77,-27.39 v1(34.82,-27.39)
  B.Cu w0.08: U74.C10@25.92,-27.31 25.92,-27.84 v1(25.99,-27.91) ; v1(34.82,-27.39) 34.83,-27.4 34.83,-30.49 35.46,-31.12 v2(35.98,-31.12)
BCD1#: J10.75 R312.2 U74.K16 | length 47.3
  F.Cu w0.3: v2(32.89,5.07) 32.92,5.1 J10.75@34.45,5.1
  In8.Cu w0.08: v2(32.89,5.07) 33.51,5.07 33.86,4.72 33.86,2.86 34.245,2.475 35.175,2.475 35.61,2.04 36.45,2.04 37.48,1.01 38.6,1.01 39.2,0.41 39.2,-2.25 39.68,-2.73 40.77,-2.73 41.01,-2.97 42.21,-2.97 43.52,-4.28 43.52,-8.85 v1(42.82,-9.55) ; v1(33.66,-17.87) 33.66,-17.37 34.42,-16.61 34.59,-16.61 34.92,-16.28 v1(35.19,-16.28) ; v1(33.98,-11.49) 34.19,-11.7 v1(34.86,-11.7) ; v1(34.11,-7.61) 34.11,-8.88 v1(34.53,-9.3) ; v1(34.84,-12.99) 34.85,-12.98 v1(34.85,-12.26)
  B.Cu w0.08: U74.K16@33.54,-18.42 33.66,-18.3 v1(33.66,-17.87) ; v1(33.98,-11.49) 34.53,-10.94 v1(34.53,-9.3) 34.87,-9.3 35.13,-9.56 35.13,-9.91 35.47,-10.25 38.85,-10.25 39.83,-11.23 40.65,-11.23 42.33,-9.55 v1(42.82,-9.55) ; v1(34.84,-12.99) 34.84,-14.02 35.04,-14.22 35.04,-15.64 35.19,-15.79 v1(35.19,-16.28) ; v1(34.85,-12.26) 34.86,-12.25 v1(34.86,-11.7)
BCD2: J10.134 U74.B9 | length 15.6
  F.Cu w0.3: J10.134@34.45,-32.35 35.95,-32.35 v2(35.97,-32.37)
  In3.Cu w0.08: v2(31.9,-32.7) 31.9,-32.51 32.04,-32.37 v2(35.97,-32.37)
  In8.Cu w0.08: v1(24.75,-29.3) 24.75,-29.67 25.45,-30.37 v1(26.7,-30.37)
  B.Cu w0.08: v1(26.7,-30.37) 26.7,-30.78 27.58,-31.66 28.15,-31.66 28.62,-32.13 31.33,-32.13 v2(31.9,-32.7)
  B.Cu w0.2: U74.B9@24.65,-28.58 24.65,-28.595 24.75,-28.695 v1(24.75,-29.3)
BCD2#: J10.137 R165.1 U74.A8 | length 21.2
  F.Cu w0.08: v2(20.29,-29.34) 20.94,-28.69 R165.1@22.34,-28.69
  F.Cu w0.3: v2(32.09,-35.04) 32.88,-34.25 J10.137@34.45,-34.25
  In8.Cu w0.08: v1(23.49,-30.75) 24.99,-32.25 26.94,-32.25 27.08,-32.39 28.73,-32.39 29.35,-33.01 v1(29.35,-33.7)
  B.Cu w0.08: v2(20.29,-29.34) 20.24,-29.39 20.24,-30.14 20.71,-30.61 22.41,-30.61 22.54,-30.74 23.48,-30.74 v1(23.49,-30.75) 23.49,-29.975 U74.A8@23.385,-29.87 ; v1(29.35,-33.7) 29.78,-33.7 29.97,-33.89 31.24,-33.89 32.09,-34.74 v2(32.09,-35.04)
BCD3: J10.74 U74.L14 | length 30.8
  F.Cu w0.3: v2(32.9,6.03) 33.18,5.75 J10.74@34.45,5.75
  In8.Cu w0.08: v1(29.12,-11.8) 29.23,-11.69 29.23,-10.52 30.52,-9.23 30.52,-6.44 29.68,-5.6 29.68,1.29 30.03,1.64 30.03,2.74 29.93,2.84 29.93,3.21 30.05,3.33 30.05,4.8 30.64,5.39 32.26,5.39 v2(32.9,6.03) ; v1(30.39,-13.39) 30.14,-13.39 29.63,-13.9 29.63,-15.02 29.52,-15.13 29.52,-16.72 30,-17.2 v1(30.44,-17.2)
  B.Cu w0.08: v1(29.12,-11.8) 29.12,-12.28 29.64,-12.8 30.3,-12.8 30.39,-12.89 v1(30.39,-13.39) ; v1(30.44,-17.2) 30.49,-17.15 U74.L14@31,-17.15
BCD4: J10.76 U74.K15 | length 55.9
  F.Cu w0.08: J10.76@34.45,4.45 36.15,4.45 36.47,4.13 36.47,2.94 36.66,2.75 36.66,1.93 36.98,1.61 36.98,1.19 36.7,0.91 36.7,-2.25 v3(37.06,-2.61) ; v3(41.04,-7.27) 41.04,-7.66 41.96,-8.58 41.96,-9.43 42.27,-9.74 44.48,-9.74 44.96,-10.22 v3(44.96,-12.57)
  In1.Cu w0.08: v3(37.06,-2.61) 37.09,-2.61 38.52,-4.04 38.52,-5.18 39.2,-5.86 39.2,-6.21 39.82,-6.83 40.4,-6.83 40.84,-7.27 v3(41.04,-7.27) ; v3(44.96,-12.57) 44.65,-12.57 43.98,-13.24 43.98,-22.04 44.56,-22.62 45.77,-22.62 v4(46.56,-23.41)
  In3.Cu w0.08: v2(37.22,-22.06) 37.61,-22.45 38.19,-22.45 39.43,-23.69 43.3,-23.69 44.12,-22.87 46.02,-22.87 v4(46.56,-23.41)
  In8.Cu w0.08: v1(32.57,-18.57) 33.13,-18.57 33.95,-19.39 34.57,-19.39 34.63,-19.33 v1(35.45,-19.33)
  B.Cu w0.08: U74.K15@32.27,-18.42 32.42,-18.57 v1(32.57,-18.57) ; v1(35.45,-19.33) 35.46,-19.34 36.26,-19.34 36.26,-19.35 36.46,-19.55 36.46,-19.93 36.26,-20.13 36.26,-20.63 36.75,-21.12 36.75,-21.59 v2(37.22,-22.06)
BCD5: J10.78 U74.J16 | length 39.5
  In1.Cu w0.08: v2(31.24,3.11) 32.49,3.11 32.71,3.33 33.02,3.33 33.15,3.2 v3(34.45,3.2)
  In8.Cu w0.08: v1(29.39,3.09) 29.39,0.92 29.21,0.74 29.21,-1.45 27.86,-2.8 27.86,-4.19 29.87,-6.2 29.87,-9.21 28.45,-10.63 28.19,-10.63 26.82,-12 26.82,-13.57 27.05,-13.8 27.05,-15.05 26.2,-15.9 26.2,-16.88 26.39,-17.07 26.88,-17.07 27.12,-17.31 27.12,-18.32 28.78,-19.98 29.56,-19.98 29.85,-20.27 29.85,-20.55 30.1,-20.8 33.27,-20.8 33.64,-20.43 v1(33.64,-20.39)
  B.Cu w0.08: v1(29.39,3.09) 29.88,3.09 30.17,3.38 30.5,3.38 30.77,3.11 v2(31.24,3.11) ; U74.J16@33.54,-19.69 33.54,-20.29 v1(33.64,-20.39)
BCD6: J10.80 U74.J14 | length 37.5
  F.Cu w0.3: v2(32.84,2.01) 32.9,1.95 J10.80@34.45,1.95
  In8.Cu w0.08: v1(28.95,1.75) 28.95,1.28 28.26,0.59 28.26,-0.79 26.39,-2.66 26.39,-5.31 28.22,-7.14 28.22,-8.87 27.92,-9.17 27.31,-9.17 26.28,-10.2 26.28,-10.49 25.9,-10.87 25.9,-13.56 25.8,-13.66 25.8,-17.02 26.06,-17.28 26.06,-20.47 26.43,-20.84 28.48,-20.84 28.59,-20.95 29.95,-20.95 30.21,-21.21 v1(30.38,-21.21)
  B.Cu w0.08: v1(28.95,1.75) 31.38,1.75 31.49,1.86 32.27,1.86 32.41,2 32.83,2 v2(32.84,2.01) ; v1(30.38,-21.21) 30.38,-20.92 31,-20.3 U74.J14@31,-19.69
BCD7: J10.82 U74.H14 | length 42.9
  F.Cu w0.3: J10.82@34.45,0.65 35.76,0.65 35.92,0.49 v2(35.92,0.01)
  In6.Cu w0.08: v2(35.92,0.01) 36.32,0.01 36.52,0.21 37.72,0.21 39.38,-1.45 39.38,-13 39.94,-13.56 40.61,-13.56 42.29,-15.24 42.29,-16.05 41.75,-16.59 v4(41.75,-17.32)
  In8.Cu w0.08: v1(31.12,-21.22) 31.12,-21.89 32.12,-22.89 v1(34.29,-22.89) ; v1(40.46,-23.78) 40.13,-23.45 40.13,-22.78 40.63,-22.28 40.63,-20.01 v1(41.1,-19.54)
  B.Cu w0.08: U74.H14@31,-20.99 31.12,-21.11 v1(31.12,-21.22) 31.12,-21.08 U74.H14@31,-20.96 ; v1(34.29,-22.89) 35.56,-24.16 38.08,-24.16 38.17,-24.07 40.17,-24.07 v1(40.46,-23.78) ; v1(41.1,-19.54) 41.16,-19.48 41.16,-17.91 v4(41.75,-17.32)
BCD8: J10.131 U74.B10 | length 11.4
  F.Cu w0.3: v2(33.04,-30.5) 33.09,-30.45 J10.131@34.45,-30.45
  In4.Cu w0.08: v2(25.38,-29.35) 25.98,-29.35 27.8,-31.17 31.29,-31.17 31.48,-31.36 32.18,-31.36 v2(33.04,-30.5)
  B.Cu w0.08: v2(25.38,-29.35) 25.65,-29.35 25.92,-29.08 U74.B10@25.92,-28.58
BCD9: J10.133 U74.A9 | length 10.8
  F.Cu w0.3: v2(33.04,-31.75) J10.133@34.45,-31.75
  In8.Cu w0.08: v1(25.91,-30.7) 26.49,-30.7 27.58,-31.79 31.03,-31.79 31.29,-32.05 32.01,-32.05 32.31,-31.75 v2(33.04,-31.75)
  B.Cu w0.08: U74.A9@24.655,-29.87 25.25,-30.465 25.665,-30.465 25.9,-30.7 v1(25.91,-30.7)
BCD10: J10.135 U74.D9 | length 15
  F.Cu w0.3: v2(33.04,-32.95) 33.09,-33 J10.135@34.45,-33
  In6.Cu w0.08: v2(30.36,-28.07) 29.86,-28.57 29.86,-29.99 31.27,-31.4 31.45,-31.4 33,-32.95 v2(33.04,-32.95)
  In8.Cu w0.08: v1(24.72,-26.55) 24.98,-26.29 27.01,-26.29 27.89,-27.17 29.46,-27.17 v2(30.36,-28.07)
  B.Cu w0.08: U74.D9@24.65,-26.04 24.65,-26.48 v1(24.72,-26.55)
BCD11: J10.77 U74.K14 | length 38.2
  F.Cu w0.3: J10.77@34.45,3.85 35.85,3.85 v2(35.96,3.74)
  In6.Cu w0.08: v2(30.42,-17.72) 29.07,-17.72 27.3,-15.95 26.48,-15.95 26.12,-15.59 26.12,-5.19 27.94,-3.37 27.94,0.59 28.83,1.48 28.83,5.42 29.54,6.13 32.02,6.13 32.56,5.59 34.11,5.59 v2(35.96,3.74)
  B.Cu w0.08: v2(30.42,-17.72) 30.42,-17.76 31,-18.34 U74.K14@31,-18.42
BCD12: J10.79 U74.J15 | length 29.7
  F.Cu w0.3: v2(32.84,2.83) 33.12,2.55 J10.79@34.45,2.55
  In6.Cu w0.08: v2(31.68,-20.39) 31.1,-19.81 31.1,-16.15 30.9,-15.95 30.9,-12.65 31.04,-12.51 31.04,-7.97 31.53,-7.48 32.38,-7.48 34.24,-5.62 34.24,-2.2 33.6,-1.56 32.99,-1.56 32.03,-0.6 32.03,1.82 32.46,2.25 32.46,2.45 v2(32.84,2.83)
  B.Cu w0.08: v2(31.68,-20.39) 31.68,-20.28 U74.J15@32.27,-19.69
BCD13: J10.81 U74.H16 | length 91.1
  F.Cu w0.3: J10.81@34.45,1.3 35.89,1.3 v2(35.92,1.27)
  In6.Cu w0.08: v2(35.92,1.27) 37.35,1.27 39.56,-0.94 39.56,-12.85 40.07,-13.36 40.82,-13.36 43.89,-16.43 43.89,-24.33 44.5,-24.94 44.5,-37.13 44.3,-37.33 44.3,-38.97 44.74,-39.41 44.74,-41.36 44.2,-41.9 v2(44.2,-42.41)
  In8.Cu w0.08: v1(34.28,-17.62) 34.67,-17.62 34.83,-17.78 35.6,-17.78 35.77,-17.61 36.23,-17.61 36.33,-17.71 v1(36.71,-17.71) ; v1(39.77,-18.08) 39.85,-18 40.39,-18 41.28,-18.89 41.97,-18.89 42.29,-19.21 42.29,-22.19 41.27,-23.21 41.27,-25.04 41.34,-25.11 41.34,-26.1 40.63,-26.81 40.63,-29.46 41.16,-29.99 41.52,-29.99 42.41,-30.88 43.79,-30.88 44.02,-31.11 44.02,-36.17 43.71,-36.48 43.71,-40.56 43.23,-41.04 43.23,-41.91 43.73,-42.41 v2(44.2,-42.41)
  B.Cu w0.08: U74.H16@33.54,-20.96 34,-20.96 34.17,-20.79 34.17,-20.67 34.42,-20.42 34.42,-18.97 34.18,-18.73 34.18,-18.05 34.28,-17.95 v1(34.28,-17.62) ; v1(36.71,-17.71) 36.71,-17.94 37.02,-18.25 37.51,-18.25 37.68,-18.08 v1(39.77,-18.08)
BCD14: J10.83 U74.H15 | length 27.9
  F.Cu w0.3: v2(32.85,0.06) 32.86,0.05 J10.83@34.45,0.05
  In6.Cu w0.08: v2(32.85,0.06) 33.63,0.06 35.46,-1.77 35.46,-18.51 v2(35.9,-18.95)
  In8.Cu w0.08: v1(32.84,-21.13) 33.61,-21.13 34.04,-20.7 v1(34.04,-20.4) ; v1(34.11,-19.07) 34.23,-18.95 v2(35.9,-18.95)
  B.Cu w0.08: U74.H15@32.27,-20.96 32.27,-20.975 U74.H15@32.275,-20.98 32.69,-20.98 v1(32.84,-21.13) ; v1(34.04,-20.4) 34.04,-20.18 34.19,-20.03 34.19,-19.36 34.11,-19.28 v1(34.11,-19.07)
BCD15: J10.85 U74.G14 | length 36.1
  In1.Cu w0.08: v2(31.57,-0.31) 32.51,-1.25 v3(34.45,-1.25)
  In8.Cu w0.08: v1(25.89,-2.79) 25.2,-3.48 25.2,-8.03 24.75,-8.48 24.75,-12.33 24.67,-12.41 24.67,-18.19 24.94,-18.46 24.94,-20.61 25.56,-21.23 28.22,-21.23 29.22,-22.23 29.49,-22.23 29.85,-22.59 30.21,-22.59 30.5,-22.3 v1(30.92,-22.3) ; v1(27.44,-2.78) 27.44,-1.94 28.7,-0.68 v1(28.7,-0.34)
  B.Cu w0.08: v1(25.89,-2.79) 27.43,-2.79 v1(27.44,-2.78) ; v1(28.7,-0.34) 31.54,-0.34 v2(31.57,-0.31) ; v1(30.92,-22.3) 30.93,-22.3 U74.G14@31,-22.23
BCE1#: J10.84 U74.G16 | length 35.1
  F.Cu w0.3: v2(32.85,-0.63) 32.88,-0.6 J10.84@34.45,-0.6
  In8.Cu w0.08: v2(32.85,-0.63) 31.98,-1.5 31.98,-2.1 33.01,-3.13 37.38,-3.13 38.23,-3.98 38.23,-6.66 38.42,-6.85 38.42,-9.51 39.09,-10.18 39.09,-11.72 39.21,-11.84 39.21,-12.57 39.12,-12.66 v1(39.12,-13.6) ; v1(34.54,-15.91) 34.95,-15.5 v1(35.37,-15.5)
  B.Cu w0.08: U74.G16@33.54,-22.23 34.41,-21.36 34.41,-20.72 34.59,-20.54 34.59,-18.84 34.42,-18.67 34.42,-18.09 34.62,-17.89 34.62,-17.35 34.65,-17.32 34.65,-16.69 34.58,-16.62 34.58,-15.95 v1(34.54,-15.91) ; v1(35.37,-15.5) 35.37,-13.2 35.67,-12.9 36.76,-12.9 37.57,-13.71 38.44,-13.71 38.55,-13.6 v1(39.12,-13.6)
BCE2#: J10.87 U74.F16 | length 33.2
  In1.Cu w0.08: v3(34.45,-2.55) 34.57,-2.55 34.62,-2.6 36.39,-2.6 36.64,-2.85 36.64,-4.13 38.19,-5.68 38.19,-7.32 37.68,-7.83 36.99,-7.83 v2(36.57,-8.25)
  In6.Cu w0.08: v2(36.57,-8.25) 36.58,-8.26 v2(36.58,-10.8)
  In8.Cu w0.08: v2(36.58,-10.8) 37.04,-11.26 37.77,-11.26 38.28,-11.77 38.28,-12.79 38.44,-12.95 38.44,-14.46 39.29,-15.31 39.29,-16.7 39.09,-16.9 39.09,-21.12 38.92,-21.29 38.92,-23.15 38.64,-23.43 v1(38.64,-24.61)
  B.Cu w0.08: U74.F16@33.54,-23.5 34.11,-24.07 34.68,-24.07 35.15,-24.54 38.57,-24.54 v1(38.64,-24.61)
BCIORD#: J10.91 U74.E16 | length 25.8
  In1.Cu w0.08: v2(32.42,-8.24) 32.42,-7.56 32.89,-7.09 33.81,-7.09 34.45,-6.45 v3(34.45,-5.1)
  In6.Cu w0.08: v2(32.42,-8.24) 34.24,-8.24 35.26,-9.26 35.26,-18.88 35.5,-19.12 35.5,-19.95 36.34,-20.79 v2(36.34,-21.8)
  In8.Cu w0.08: v1(34.62,-24.46) 35.23,-24.46 35.97,-23.72 35.97,-23.53 36.41,-23.09 36.41,-22.46 36.34,-22.39 v2(36.34,-21.8)
  B.Cu w0.08: U74.E16@33.54,-24.77 34.31,-24.77 v1(34.62,-24.46)
BCIOWR#: J10.93 U74.G13 | length 28.6
  F.Cu w0.08: v2(31.54,-6.85) 32.04,-6.35 J10.93@34.45,-6.35
  In3.Cu w0.08: v2(26.61,-8.88) 26.68,-8.88 27.05,-9.25 30.47,-9.25 30.99,-8.73 30.99,-7.93 31.54,-7.38 v2(31.54,-6.85)
  In8.Cu w0.08: v2(26.61,-8.88) 26.61,-9.35 26.05,-9.91 26.05,-10.42 25.67,-10.8 25.67,-13.17 25.42,-13.42 25.13,-13.42 24.87,-13.68 24.87,-18.07 25.83,-19.03 25.83,-20.7 26.15,-21.02 28.39,-21.02 28.54,-21.17 29.59,-21.17 30.03,-21.61 v1(30.03,-22.25)
  B.Cu w0.08: U74.G13@29.73,-22.23 29.75,-22.25 v1(30.03,-22.25)
BINPACK#: J10.123 R172.1 U74.B12 | length 35.7
  F.Cu w0.08: v3(28.74,-20.22) 29.035,-19.925 29.485,-19.925 29.75,-19.66 29.75,-13.83 v3(29.5,-13.58) ; v3(28.89,-24.45) 32.51,-24.45 32.93,-24.87 32.94,-24.87 33.03,-24.96 v2(33.03,-25.48)
  F.Cu w0.3: v3(30.33,-13.42) R172.1@31.02,-13.42 ; v2(33.03,-25.48) 33.11,-25.4 J10.123@34.45,-25.4
  In1.Cu w0.08: v3(28.74,-20.22) 28.74,-23.99 28.89,-24.14 v3(28.89,-24.45) ; v3(29.5,-13.58) 29.75,-13.58 29.91,-13.42 v3(30.33,-13.42) ; v2(33.03,-25.48) 33.58,-26.03 33.58,-28.24 34.57,-29.23 v2(35.91,-29.23)
  In8.Cu w0.08: v1(28.57,-29.28) 28.57,-30.52 28.75,-30.7 29.56,-30.7 30,-30.26 30.86,-30.26 31.12,-30 31.68,-30 32.82,-28.86 34.9,-28.86 35.27,-29.23 v2(35.91,-29.23)
  B.Cu w0.2: U74.B12@28.46,-28.58 28.46,-29.17 v1(28.57,-29.28)
BIOS_SA17: U35.54 U59.40 | length 142.1
  F.Cu w0.08: v3(43.42,-6.59) 43.74,-6.59 44.03,-6.3 45.98,-6.3 46.22,-6.54 v3(49.72,-6.54) ; v3(51.93,-5.67) 52.33,-5.27 52.33,-3.74 v3(52.54,-3.53) ; v3(58.84,-5.48) 58.84,-7.47 58.51,-7.8 58.51,-9.33 58.18,-9.66 58.18,-12.59 58.4,-12.81 v5(59.03,-12.81)
  In1.Cu w0.08: v2(-1.18,-37.52) 6.12,-37.52 6.68,-36.96 6.68,-33.21 5.8,-32.33 5.8,-30.81 6.86,-29.75 v3(7.51,-29.75) ; v4(41.74,-6.83) 42.44,-6.83 42.68,-6.59 v3(43.42,-6.59) ; v3(49.72,-6.54) 50.99,-6.54 51.86,-5.67 v3(51.93,-5.67) ; v3(52.54,-3.53) 54.45,-3.53 54.81,-3.17 55.31,-3.17 55.71,-3.57 57.16,-3.57 58.84,-5.25 v3(58.84,-5.48)
  In4.Cu w0.08: v2(-1.18,-37.52) 0.75,-35.59 0.75,-33.27 4.28,-29.74 19.63,-29.74 20.04,-30.15 24.36,-30.15 24.72,-30.51 26.21,-30.51 27.24,-31.54 30.6,-31.54 31.51,-32.45 31.51,-33.6 32.74,-34.83 33.62,-34.83 34.47,-35.68 38.42,-35.68 38.88,-35.22 51.42,-35.22 51.87,-34.77 52.94,-34.77 55.25,-32.46 55.25,-28.06 57.13,-26.18 57.93,-26.18 58.78,-25.33 58.78,-23.94 58.565,-23.725 58.565,-21.345 58.99,-20.92 58.99,-20.28 58.53,-19.82 58.53,-13.31 v5(59.03,-12.81)
  In8.Cu w0.08: v1(40.96,-5.62) 41.74,-6.4 v4(41.74,-6.83)
  B.Cu w0.08: U59.40@34.59,-5.96 35.39,-5.96 35.56,-6.13 38.39,-6.13 39.28,-5.24 40.58,-5.24 v1(40.96,-5.62)
BOE#: J10.88 U74.F14 | length 37.1
  F.Cu w0.3: v2(33.06,-3.8) 33.06,-3.32 33.23,-3.15 J10.88@34.45,-3.15
  In4.Cu w0.08: v2(24.52,-3.97) 30.77,-3.97 30.79,-3.99 30.85,-3.99 31,-4.14 32.72,-4.14 v2(33.06,-3.8)
  In8.Cu w0.08: v2(24.52,-3.97) 24.52,-12.14 23.6,-13.06 23.6,-21.81 23.91,-22.12 28.82,-22.12 29.15,-22.45 29.365,-22.45 30.315,-23.4 30.73,-23.4 v1(30.91,-23.58)
  B.Cu w0.08: v1(30.91,-23.58) 30.92,-23.58 U74.F14@31,-23.5
Bowman1: U21.45 U61.N9 | length 36.5
  F.Cu w0.08: v3(-10.28,-0.71) v3(-8.91,-0.71)
  In1.Cu w0.08: v3(-10.28,-0.71) -10.23,-0.76 -10.23,-10.6 -10.4,-10.77 -10.4,-12.72 v3(-10.18,-12.94) ; v3(-8.91,-0.71) -8.91,0.67 v2(-8.89,0.69)
  In8.Cu w0.08: v1(-9.44,1.29) -8.84,1.89 -8.84,3.34 -8.99,3.49 -8.99,4.39 -8.73,4.65 v1(-8.73,6.01) ; v1(-7.43,7.38) -6.88,7.38 -6.57,7.69 -6.15,7.69 -5.1,8.74 v1(-5.1,9.25) ; v1(0.21,9.85) 2.84,9.85 3.37,10.38 v1(3.37,10.94)
  B.Cu w0.08: v1(-9.44,1.29) -8.89,0.74 v2(-8.89,0.69) ; v1(-8.73,6.01) -8.73,6.31 -8.29,6.75 -7.81,6.75 -7.43,7.13 v1(-7.43,7.38) ; v1(-5.1,9.25) 0.09,9.25 0.21,9.37 v1(0.21,9.85)
Bowman2: U21.140 U61.P9 | length 22.4
  F.Cu w0.08: v3(-11.05,11.36) -10.43,11.36 -10.08,11.01 -5.46,11.01 v2(-4.95,10.5)
  In1.Cu w0.08: v3(-12.18,8.535) -11.05,9.665 v3(-11.05,11.36)
  In8.Cu w0.08: v1(-2.66,10.59) -2.66,12.09 -1.99,12.76 0,12.76 v1(0.18,12.58) ; v1(0.18,11.73) 0.84,11.73 1.24,11.33 3.89,11.33 v1(4.03,11.47)
  B.Cu w0.08: v2(-4.95,10.5) -2.75,10.5 v1(-2.66,10.59) ; v1(0.18,11.73) v1(0.18,12.58) ; v1(4.03,11.47) 4.31,11.19 U61.P9@4.64,11.19
Bowman3: R149.2 U61.R9 | length 47.4
  F.Cu w0.4: v2(-14.75,-15.18) -14.53,-15.4 R149.2@-14.53,-15.91
  In3.Cu w0.08: v2(-14.98,9.58) -14.91,9.65 4.49,9.65 5.26,10.42 v2(5.35,10.42)
  In6.Cu w0.08: v2(-14.98,9.58) -15.02,9.54 -15.02,9.51 -15.03,9.5 -15.03,-10.86 -15.08,-10.91 -15.08,-13.14 -14.75,-13.47 v2(-14.75,-15.18)
  B.Cu w0.08: v2(5.35,10.42) 5.35,10.44 5.91,11 U61.R9@5.91,11.19
Bowman4: U21.52 U61.T9 | length 41.8
  F.Cu w0.08: v3(-6.18,-0.31) -5.8,0.07 -5.25,0.07 -4.65,-0.53 -3.14,-0.53 v2(-2.77,-0.9)
  In1.Cu w0.08: v3(-6.68,-12.94) -6.68,-12.14 -6.9,-11.92 -6.9,-6.61 -6.18,-5.89 v3(-6.18,-0.31)
  In8.Cu w0.08: v2(-2.77,-0.9) -2.77,0.38 v1(-2.759,0.391)
  B.Cu w0.08: v1(-2.759,0.391) -2.329,0.391 -2,0.72 -0.29,0.72 0.09,0.34 1.14,0.34 1.53,0.73 1.53,1.08 2.03,1.58 6.51,1.58 7.04,1.05 7.57,1.05 8.49,1.97 8.49,3.34 8.35,3.48 8.35,5.37 8.89,5.91 8.89,10.25 7.95,11.19 U61.T9@7.18,11.19
Bowman5: R57.1 U7.3 U21.130 U61.T13 | length 60.1
  F.Cu w0.08: v3(-24.362,15.025) -19.565,15.025 v3(-19.55,15.04) ; v3(-11.37,6.24) -7.06,6.24 ; U21.130@-7.18,8.535 -7.18,6.24 -7.06,6.24 ; v3(2.37,4.8) 2.34,4.83 -1.02,4.83 -1.22,5.03 -3.47,5.03 -4.13,5.69 -5.17,5.69 -5.72,6.24 -7.06,6.24 ; v3(7.15,2.6) 7.43,2.88 7.56,2.88 v3(8.09,3.41)
  In1.Cu w0.08: v3(-26.04,14.8) -25.815,15.025 v3(-24.362,15.025) ; v3(-19.55,15.04) -19.55,13.55 -17.39,11.39 -14.39,11.39 -13.79,10.79 -13.59,10.79 -13,10.2 -13,8.45 -11.37,6.82 v3(-11.37,6.24) ; v3(2.37,4.8) 2.37,3.88 2.74,3.51 5.45,3.51 6.36,2.6 v3(7.15,2.6) ; v3(8.09,3.41) 9.89,1.61 v2(12.3,1.61)
  In8.Cu w0.08: v1(7.91,3.14) 12.27,3.14 12.3,3.11 12.35,3.11 13.03,2.43 13.03,1.93 12.71,1.61 v2(12.3,1.61)
  B.Cu w0.08: U61.T13@7.18,6.11 8.1,5.19 8.1,4.02 7.94,3.86 7.94,3.17 v1(7.91,3.14)
Bowman5_Buff: U7.22 U60.1 | length 44.2
  F.Cu w0.08: v2(-18.69,13.82) -18.69,14.52 -18.185,15.025 U7.22@-16.937,15.025
  In3.Cu w0.08: v2(-21.08,-1.65) -21.02,-1.59 -19.93,-1.59 -19.31,-0.97 -5.09,-0.97 -4.67,-1.39 -3.825,-1.39 -3.5,-1.065 -3.5,-0.6 -3.27,-0.37 -2.28,-0.37 -1.17,-1.48 v2(-0.79,-1.48)
  In4.Cu w0.08: v2(-21.08,-1.65) -19.32,0.11 -19.32,4.15 -17.89,5.58 -17.89,12.98 -18.69,13.78 v2(-18.69,13.82)
  In8.Cu w0.08: v1(-0.6,-2.57) -0.15,-3.02 v1(-0.15,-3.16)
  B.Cu w0.08: v2(-0.79,-1.48) -0.79,-2.31 -0.6,-2.5 v1(-0.6,-2.57) ; v1(-0.15,-3.16) -0.15,-3.76 U60.1@-0.14,-3.77
Bowman_Audio_Vol_Dn: U21.128 U48.7 | length 45.9
  F.Cu w0.08: v3(-3.99,17.7) -3.89,17.8 -3.89,20.05 -3.74,20.2 -3.32,20.2 -3.06,20.46 v3(-1.57,20.46) ; v3(-1.5,27.98) -1.5,25.27 -1.38,25.15 v3(-1.38,24.77)
  In1.Cu w0.08: v3(-6.18,8.535) -5.16,9.555 -5.16,10.09 -5.38,10.31 -5.38,10.77 -5.24,10.91 -5.24,17.02 -4.56,17.7 v3(-3.99,17.7) ; v3(-1.57,20.46) -1.29,20.74 -1.28,20.74 -1.28,24.08 -1.38,24.18 v3(-1.38,24.77) ; v3(-1.5,27.98) -1.5,28.96 -0.56,29.9 v2(0.01,29.9)
  In3.Cu w0.08: v2(0.01,29.9) 0.5,30.39 6.32,30.39 9.41,33.48 9.41,36.89 9.05,37.25 v2(8.54,37.25)
  In8.Cu w0.08: v2(8.54,37.25) 9.31,38.02 9.31,39.66 v1(10.56,40.91)
Bowman_Audio_Vol_Up: U21.127 U48.2 | length 54.7
  F.Cu w0.08: U21.127@-5.68,8.535 -5.68,9.59 -5.29,9.98 -4.84,9.98 -3.92,10.9 -3.69,10.9 -2.79,11.8 -1.89,11.8 -1.62,12.07 v3(-1.62,16.04) ; v3(0.01,21.85) 0.1,21.76 4.86,21.76 5.05,21.57 7.89,21.57 v3(7.94,21.52) ; v3(5.92,33.88) 6.76,33.88 6.95,34.07 6.95,36.75 8.15,37.95 8.15,38.55 9.05,39.45 v3(10.5,39.45)
  In1.Cu w0.08: v3(-1.62,16.04) -0.46,16.04 -0.1,16.4 -0.1,21.74 v3(0.01,21.85) ; v3(5.92,33.88) 6.05,33.75 6.05,26.12 7.94,24.23 v3(7.94,21.52) ; v3(10.5,39.45) 10.5,44.25 v2(10.55,44.3)
  In8.Cu w0.08: v2(10.55,44.3) 10.55,46.75 v1(10.56,46.76)
Bowman_CLK: R340.2 U21.40 | length 52.8
  F.Cu w0.08: v2@-12.71,-11.08 v2(-12.71,-11.03)
  F.Cu w0.3: v2(-12.71,-11.03) -12.698,-11.042 U21.40@-12.698,-12.94
  In3.Cu w0.08: v2(-38.81,-9.76) -37.98,-9.76 -37.91,-9.83 -14.82,-9.83 -14.14,-10.51 -13.23,-10.51 v2(-12.71,-11.03)
  In6.Cu w0.08: v2(-38.81,-9.76) -38.37,-9.32 -38.37,-4.1 -39.32,-3.15 -39.32,7.58 -38.58,8.32 v2(-38.58,11.81)
  B.Cu w0.08: v2(-38.58,11.81) v2@-38.56,11.79
  B.Cu w0.2: v2@-38.56,11.79 R340.2@-36.79,11.79
Bowman_ESS_DACK1#: R372.2 U21.122 U72.10 | length 105.1
  F.Cu w0.08: U21.122@-3.18,8.535 -3.18,7.58 -2.92,7.32 v3(-2.05,7.32) ; v3(-3.05,-3.77) -3.05,-4.72 -2.09,-5.68 v3(-2.09,-6.38)
  In1.Cu w0.08: v3(-3.05,-3.77) -3.05,-2.15 -3.2,-2 -3.2,0.21 -2.99,0.42 -2.99,3.945 -1.85,5.085 -1.85,7.12 v3(-2.05,7.32) ; v3(-2.09,-6.38) -2.09,-7.53 -3.08,-8.52 -3.08,-29.93 -2.76,-30.25 v2(-2.01,-30.25)
  In5.Cu w0.08: v2(-2.01,-30.25) -1.55,-30.25 -0.93,-29.63 19.31,-29.63 20.14,-28.8 34.42,-28.8 35.18,-28.04 37.93,-28.04 39.58,-29.69 41.4,-29.69 41.84,-29.25 51.75,-29.25 51.87,-29.37 51.87,-29.4 v5(52.17,-29.7)
  In8.Cu w0.08: v5(52.17,-29.7) 53.65,-31.18 53.65,-31.395 v1(54.93,-32.675)
  B.Cu w0.08: v1(54.93,-32.675) 56.316,-32.675 56.621,-32.98 R372.2@57.44,-32.98
BRDY: J10.102 R166.2 U74.B16 | length 54.2
  F.Cu w0.3: J10.102@34.45,-12.1 35.91,-12.1 v2(35.94,-12.07)
  In1.Cu w0.08: v3(32.14,-24.94) 32.07,-24.94 31.68,-25.33 31.68,-26.23 32.23,-26.78 32.23,-27.69 32.95,-28.41 33.08,-28.41 35.1,-30.43 v2(36.61,-30.43)
  In4.Cu w0.08: v2(35.94,-12.07) 31.48,-12.07 31.04,-11.63 28.46,-11.63 28.51,-11.58 27.41,-12.68 27.41,-24.54 29.01,-26.14 33.71,-26.14 34.65,-27.08 34.65,-30.73 35.8,-31.88 37.42,-31.88 37.85,-31.45 37.85,-30.62 37.66,-30.43 v2(36.61,-30.43)
  In8.Cu w0.08: v1(34.14,-30.5) 34.42,-30.5 34.71,-30.79 35.6,-30.79 35.96,-30.43 v2(36.61,-30.43)
  B.Cu w0.08: U74.B16@33.54,-28.61 33.54,-28.99 34.14,-29.59 v1(34.14,-30.5)
BREG#: J10.125 U74.L15 | length 12.4
  F.Cu w0.3: v2(33.02,-26.75) 33.07,-26.7 J10.125@34.45,-26.7
  In6.Cu w0.08: v2(31.73,-17.86) 32.56,-18.69 32.56,-20.89 32.79,-21.12 33.22,-21.12 33.49,-21.39 33.49,-26.28 v2(33.02,-26.75)
  B.Cu w0.08: v2(31.73,-17.86) 31.73,-17.69 U74.L15@32.27,-17.15
BRESET: J10.119 U74.A13 | length 18.4
  F.Cu w0.3: J10.119@34.45,-22.85 35.92,-22.85 v2(35.95,-22.88)
  In3.Cu w0.08: v2(31.81,-21.67) 32.97,-22.83 35.81,-22.83 35.86,-22.88 v2(35.95,-22.88)
  In6.Cu w0.08: v2(31.69,-30.72) 32.21,-30.2 32.21,-26.24 31.78,-25.81 31.78,-21.7 v2(31.81,-21.67)
  In8.Cu w0.08: v1(30.24,-30.88) 31.2,-30.88 31.36,-30.72 v2(31.69,-30.72)
  B.Cu w0.08: U74.A13@29.73,-29.85 29.73,-30.37 v1(30.24,-30.88)
BVPP: C273.1 J10.106 J10.107 U70.23 | length 25
  F.Cu w0.3: J10.107@34.45,-15.25 36.05,-15.25 v2(36.52,-15.72) ; J10.106@34.45,-14.65 36.49,-14.65 v2(36.52,-14.62)
  In3.Cu w0.8: 43.05,-22.9 44.36,-21.59 44.36,-20.49 44.64,-20.21
  In3.Cu w1: v2(40.6,-22.9) 43.05,-22.9
  In4.Cu w0.9: v2(36.52,-14.62) v2(36.52,-15.72) 37.77,-15.72 38.73,-16.68 38.73,-22.04 39.59,-22.9 v2(40.6,-22.9)
  B.Cu w0.3: U70.23@43.22,-19.71 44.24,-19.71 v4(44.69,-20.16)
  B.Cu w0.5: v2(36.52,-14.62) 37.115,-15.215 C273.1@38.17,-15.215
BWAIT: J10.121 R169.2 U74.C12 | length 16.8
  F.Cu w0.08: R169.2@32.2,-23.45 32.6,-23.45 33.3,-24.15 J10.121@34.45,-24.15 35.98,-24.15 v2(36.54,-23.59)
  In8.Cu w0.08: v1(28.65,-26.76) 28.65,-26.51 29.05,-26.11 30.51,-26.11 30.93,-25.69 32.72,-25.69 32.93,-25.9 34.05,-25.9 34.2,-26.05 35.4,-26.05 35.75,-25.7 36.47,-25.7 37.08,-25.09 37.08,-24.75 36.54,-24.21 v2(36.54,-23.59)
  B.Cu w0.08: U74.C12@28.46,-27.31 28.65,-27.12 v1(28.65,-26.76)
BWE#: J10.100 U74.F12 | length 106.7
  F.Cu w0.08: v3(11.55,-24.72) 11.75,-24.72 12.35,-25.32 12.85,-25.32 13.26,-24.91 15.04,-24.91 16.07,-25.94 v3(18.5,-25.94) ; v3(22.88,-26.36) 24.03,-27.51 26.16,-27.51 v3(26.4,-27.27) ; v3(27.6,-21.21) 29.05,-21.21 29.63,-20.63 29.63,-20.07 29.95,-19.75 29.95,-13.19 v3(30.59,-12.55) ; v3(32.37,-11.52) 33.09,-10.8 J10.100@34.45,-10.8
  F.Cu w0.3: J10.100@34.45,-10.8 v2(35.94,-10.8)
  In1.Cu w0.08: v2(4.04,-38.72) 4.04,-39.13 4.17,-39.26 7.29,-39.26 8.03,-38.52 8.03,-37.51 7.1,-36.58 7.1,-33.07 6.4,-32.37 6.4,-30.99 6.97,-30.42 8.09,-30.42 8.6,-29.91 8.6,-27.64 8.88,-27.36 8.88,-24.85 9.31,-24.42 11.25,-24.42 v3(11.55,-24.72) ; v3(18.5,-25.94) 22.46,-25.94 v3(22.88,-26.36) ; v3(26.4,-27.27) 26.4,-26.8 26.25,-26.65 26.25,-22.65 26.45,-22.45 26.87,-22.45 27.61,-21.71 27.61,-21.22 v3(27.6,-21.21) ; v3(30.59,-12.55) 31.05,-12.55 31.59,-12.01 31.88,-12.01 v3(32.37,-11.52)
  In8.Cu w0.08: v1(6.02,-29.65) 6.02,-35.31 6.67,-35.96 6.67,-37.45 6.08,-38.04 v1(6.08,-38.42) ; v1(12.22,-30.13) 12.69,-29.66 12.69,-27.79 v1(12.62,-27.72) ; v1(12.82,-23.93) 13.07,-23.93 13.15,-24.01 13.84,-24.01 14.49,-23.36 16.94,-23.36 17.16,-23.58 18.89,-23.58 19.06,-23.75 22.13,-23.75 22.38,-24 22.38,-24.29 22.73,-24.64 27.97,-24.64 v1(28.48,-24.13)
  B.Cu w0.08: v2(4.04,-38.72) 4.34,-38.42 v1(6.08,-38.42) ; v1(6.02,-29.65) 6.26,-29.65 6.47,-29.44 9.36,-29.44 10.55,-30.63 11.72,-30.63 v1(12.22,-30.13) ; v1(12.62,-27.72) 13.07,-27.27 13.07,-26.43 13.16,-26.34 13.16,-24.78 12.82,-24.44 v1(12.82,-23.93) ; U74.F12@28.46,-23.5 28.46,-24.11 v1(28.48,-24.13)
BWP: J10.136 R178.1 U74.C9 | length 26.8
  F.Cu w0.3: v2(31.96,-33.33) 32.28,-33.65 J10.136@34.45,-33.65
  In1.Cu w0.08: v3(24.7,-28.69) 24.7,-29.36 25.44,-30.1 28.12,-30.1 29,-30.98 30.13,-30.98 31.11,-31.96 31.11,-33 31.44,-33.33 v2(31.96,-33.33)
  In8.Cu w0.08: v1(24.55,-27.93) 24.55,-27.76 24.36,-27.57 23.86,-27.57 23.31,-28.12 23.31,-29.53 25.63,-31.85 27.16,-31.85 27.29,-31.98 29.79,-31.98 v1(30.66,-32.85)
  B.Cu w0.08: v1(24.55,-27.93) 24.65,-27.83 U74.C9@24.65,-27.31 ; v1(30.66,-32.85) 31.09,-33.28 31.91,-33.28 v2(31.96,-33.33)